# Altium PCB displays.PcbDoc
Units mm, origin at the board's own origin, x right, y up, seen from the top; angles counter-clockwise.
Board outline 140 x 42 mm, 2 copper layers (Top Layer, Bottom Layer); 16 components, 17 nets, 83 pads, 0 vias.
Unrouted connection lines stored in the file: 3.
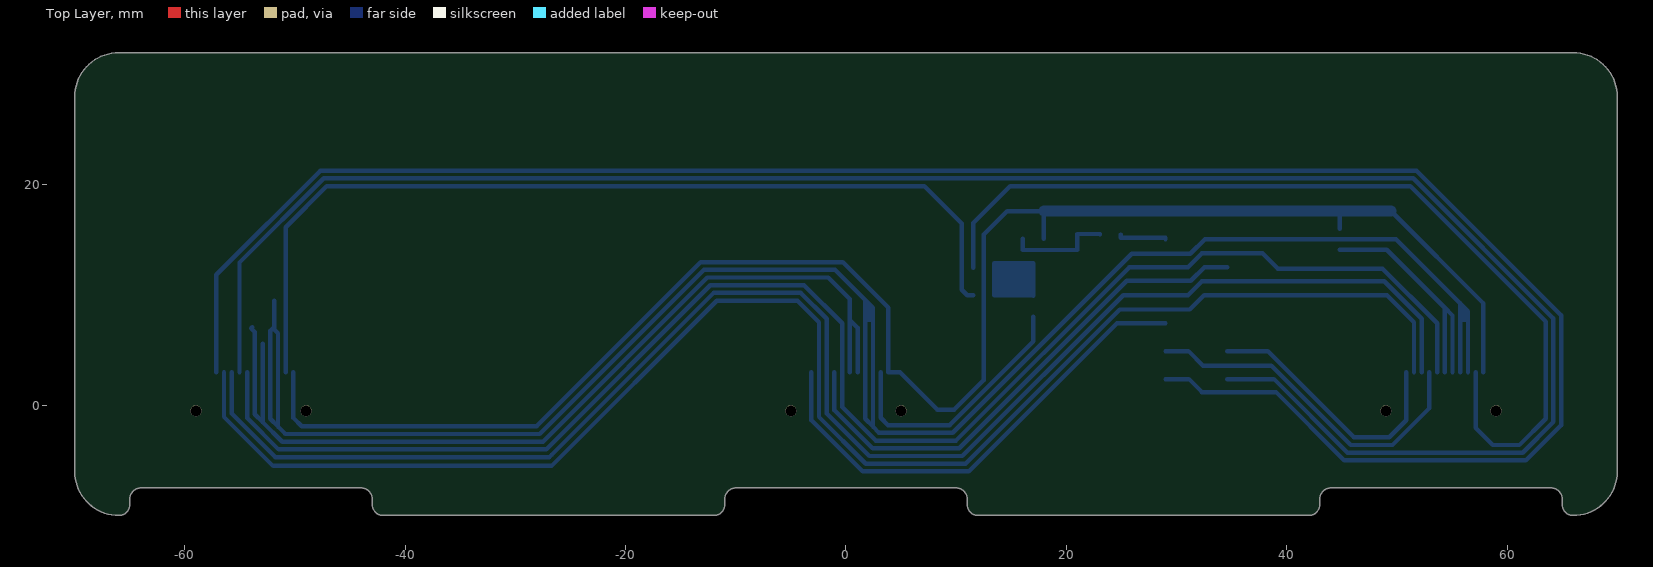
[diagram p0: Top Layer view]
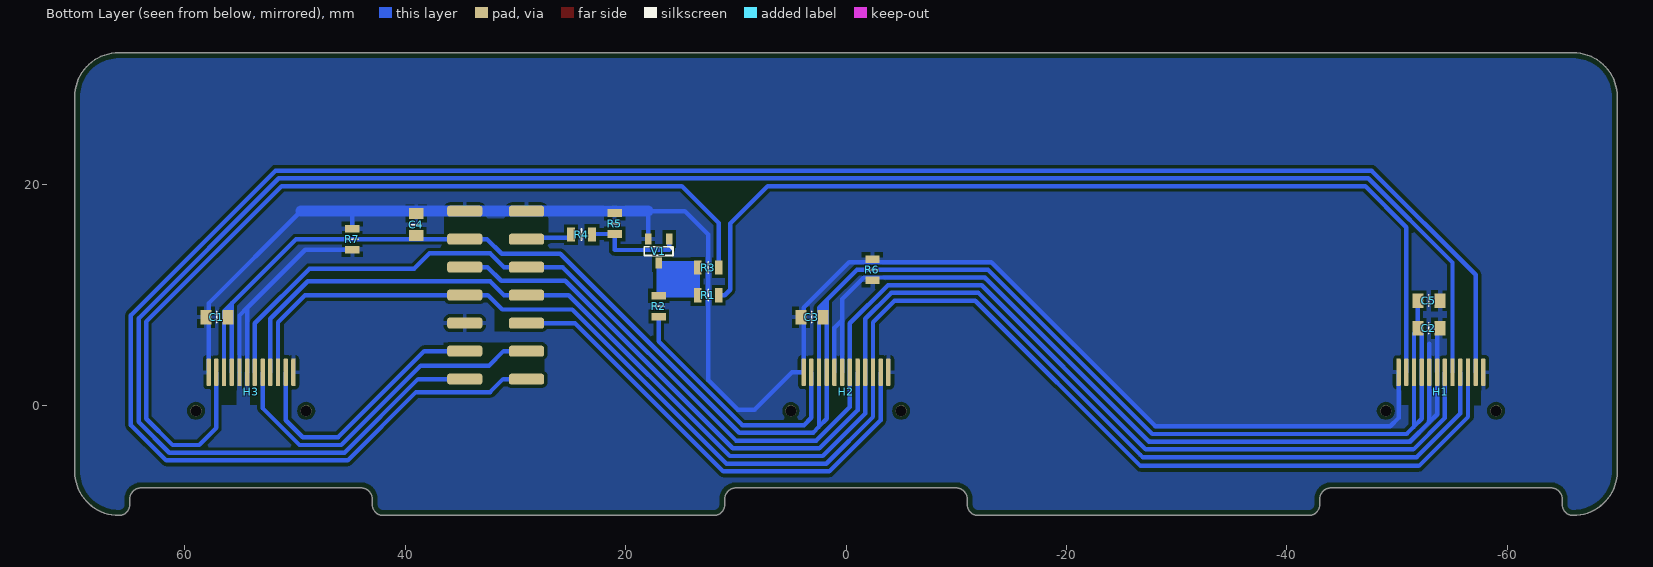
[diagram p1: Bottom Layer view, seen from below]
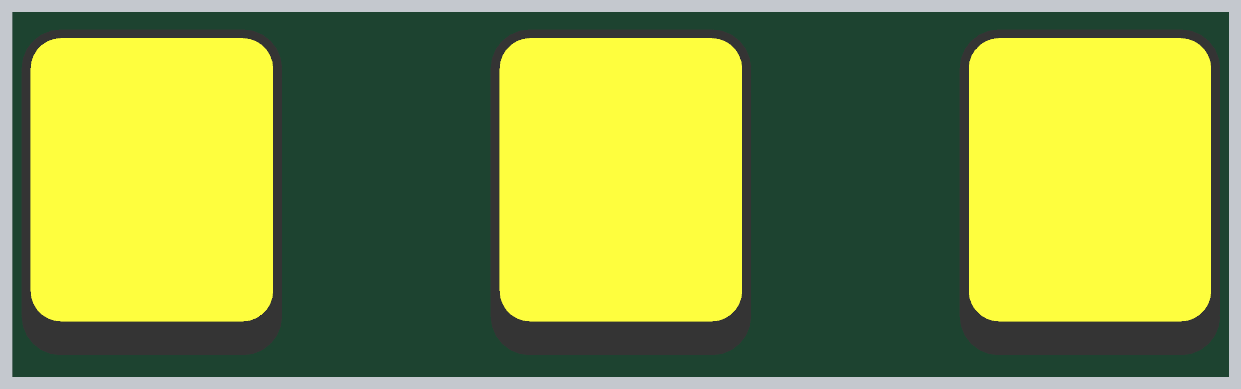
[diagram p2: 3D render of the assembled board from above, using the file's embedded part models]

## Layer stack, top to bottom
Top Solder: solder mask 0.0102, Solder Resist, Dk 3.5
Top Layer: signal copper 0.0356
Dielectric 1: dielectric 0.32, FR-4, Dk 4.8
Bottom Layer: signal copper 0.0356
Bottom Solder: solder mask 0.0102, Solder Resist, Dk 3.5

## Board outline
-66,-10 ccw(c-66,-9) -65,-9 -65,-8.5 cw(c-64,-8.5) -64,-7.5 -44,-7.5 cw(c-44,-8.5) -43,-8.5 -43,-9 ccw(c-42,-9) -42,-10 -12,-10 ccw(c-12,-9) -11,-9 -11,-8.5 cw(c-10,-8.5) -10,-7.5 10,-7.5 cw(c10,-8.5) 11,-8.5 11,-9 ccw(c12,-9) 12,-10 42,-10 ccw(c42,-9) 43,-9 43,-8.5 cw(c44,-8.5) 44,-7.5 64,-7.5 cw(c64,-8.5) 65,-8.5 65,-9 ccw(c66,-9) 66,-10 ccw(c66,-6) 70,-6 70,28 ccw(c66,28) 66,32 -66,32 ccw(c-66,28) -70,28 -70,-6 ccw(c-66,-6)

## Design rules (kind name [scope] priority, off if disabled: settings)
BoardOutlineClearance [All] p1: gap=0.5 ignorepadtopadclearanceinfootprint=FALSE
Clearance [All] p1: gap=0.3 ignorepadtopadclearanceinfootprint=FALSE
MinimumSolderMaskSliver [All] p1: minsoldermaskwidth=0.05
PolygonConnect [All] p1: connectstyle=Relief reliefconductorwidth=0.4 reliefentries=4 polygonreliefangle="90 Angle" airgapwidth=0.3
RoutingVias [All] p1: holewidth=0.711 width=1.27 viastyle="Through Hole" minholewidth=0.711 minwidth=1.27 maxholewidth=0.711 maxwidth=1.27
SilkToSilkClearance [All] p1: silktosilkclearance=0.1
SilkToSolderMaskClearance [IsPad] p1: minsilkscreentomaskgap=0.1 clearancetoexposedcopper=TRUE
SolderMaskExpansion [All] p1: expansion=0.102
Width [All] p1: maxlimit=1 minlimit=0.4 preferedwidth=0.4
27 further rules are at their usual default settings.

## Components (designator, comment, footprint, x,y, rotation, side; value= is the part's Value field where it differs from the comment)
C1 "GRM21BR71H104K" 0805-CAP 57.1,8 r180 bottom value="0.1 мкФ"
C2 "GRM21BR71H104K" 0805-CAP -52.9,7 r0 bottom value="0.1 мкФ"
C3 "GRM21BR71H104K" 0805-CAP 3.1,8 r180 bottom value="0.1 мкФ"
C4 "GRM21BR61C106K" 0805-CAP 39,16.4 r270 bottom value="10 мкФ"
C5 "GRM21BR61C106K" 0805-CAP -52.9,9.5 r0 bottom value="10 мкФ"
H1 "IPS display 240x280 st7789v2 SPI" "(Требует доработки) IPS display 240x280 st7789v2 SPI" -54,0 r0 top
H2 "IPS display 240x280 st7789v2 SPI" "(Требует доработки) IPS display 240x280 st7789v2 SPI" 0,0 r0 top locked
H3 "IPS display 240x280 st7789v2 SPI" "(Требует доработки) IPS display 240x280 st7789v2 SPI" 54,0 r0 top
R1 "RC0805FR-0710KL" 0805-RES 12.5,10 r0 bottom value="10 кОм"
R2 "RC0805FR-0710KL" 0805-RES 17,9 r90 bottom value="10 кОм"
R3 "RC0805FR-0710KL" 0805-RES 12.5,12.5 r0 bottom value="10 кОм"
R4 "RC0805FR-0710KL" 0805-RES 24,15.5 r180 bottom value="10 кОм"
R5 "RC0805FR-0710KL" 0805-RES 21,16.5 r270 bottom value="10 кОм"
R6 "RC0805FR-0710KL" 0805-RES -2.4,12.3 r270 bottom value="10 кОм"
R7 "RC0805FR-0710KL" 0805-RES 44.8,15.08 r270 bottom value="10 кОм"
V1 "IRLML2030TRPBF" SOT-23-3 17,14 r0 bottom

## Footprints (in the part's own frame and the unit in brackets; to place one, negate y for a bottom-side part, rotate by r counter-clockwise, add the part's x,y. Pads: shape width x height; smd on the part's side, far side on the other; paste and mask are expansions set on the pad)
0805-CAP [mm] "Согласно IPC-SM-782"
  rect 1x1.3 smd: 1(-1,0) 2(1,0)
  silkscreen extent 0,-0.51 0,0.51, body extent -1,-0.6 1,0.6, height 1.2
0805-RES [mm] "Standard Thick Film Chip Resistors D/CRCW e3 Vishay"
  rect 0.7x1.3 smd: 1(-0.95,0) 2(0.95,0)
  silkscreen extent 0,-0.51 0,0.51, body extent -1,-0.63 1,0.63, height 0.5
"(Требует доработки) IPS display 240x280 st7789v2 SPI" [mm] "SPI нтерфейс"
  rrect50% 0.4x2.5 smd far side: 1(3.85,3) 2(3.15,3) 3(2.45,3) 4(1.75,3) 5(1.05,3) 6(0.35,3) 7(-0.35,3) 8(-1.05,3) 9(-1.75,3) 10(-2.45,3) 11(-3.15,3) 12(-3.85,3)
  round 1 hole 1: PAD(-5,-0.5) PAD(5,-0.5)
  body extent -15,-7.5 15,30, height 1.5
SOT-23-3 [mm] "SOT-23-3 ??????? n-????????? ??????????. Designators G, D, S"
  rect 0.6x1 smd: D(0,1.1) G(-0.95,-1.1) S(0.95,-1.1)
  silkscreen extent -1.3,-0.4 1.3,0.4, body extent -1.45,-1.19 1.45,1.19, height 1

## Part data
C1 C2 C3: library part CMP-0544-A.1, "Конденсатор керамический, 0.1 мкФ, X7R, 50 В, точность 10%, 0805", Voltage="50 В", Accuracy=10%
C4 C5: library part CMP-0164-A.4, "Конденсатор керамичеcкий, 10 мкФ, X5R, 16 В, точность 10%, 0805", Manufacturer=Murata, Voltage="16 В", Accuracy="10 %"
H1 H2 H3: library part CMP-0733-A.1, "Дисплей цветной, 1.69 дюйма, 240 x 280 точки, IPS, LH169T-IG01", Manufacturer=NA, Temperature=NA
R1 R2 R3 R4 R5 R6 R7: library part CMP-0677-A.2, "Резистор, 10 кОм, 0.125 Вт, точность 1%, 0805", Accuracy=1%
V1: library part CMP-0630-A.1, "N-канальный транзистор, 30 в, 100 мОм(10 в), 2.7 а", Manufacturer="International Rectifier", Temperature="-55 - 150°C"

## Free pads (board coordinates)
  rrect50% 3.2x1 smd far side: 1(34.6,2.38) 2(29,2.38) 3(34.6,4.92) 4(29,4.92) 5(34.6,7.46) 6(29,7.46) 7(34.6,10) 8(29,10) 9(34.6,12.54) 10(29,12.54) 11(34.6,15.08) 12(29,15.08) 13(34.6,17.62) 14(29,17.62)

## Nets (pads, with @x,y where several pads share a name; then routed paths per layer and width w, separated by ;. In a path a pad name is that pad's centre, name@x,y a point inside that pad or via, vN(x,y) a via of type N, cw(c..) or ccw(c..) an arc to the next point about the centre after c; other vN are vias at no path point)
3V3: C1.2 C2.2 C3.2 C4.2 C5.2 H1.3 H1.4 H2.3 H2.4 H3.3 H3.4 pad.11 | length 181.4
  Bottom Layer w0.4: C2.2 C5.2 ; 1.75,9.5 H2.4 1.75,-1.23 2.45,-1.93 ; H3.4 55.75,9.25 ; H3.3 56.45,8.55 55.75,9.25 ; -51.55,-1.93 -50.88,-2.6 -27.79,-2.6 -12.89,12.3 -1,12.3 2.45,8.85 H2.3 2.45,-1.93 ; -51.55,-1.93 -52.25,-1.23 H1.4 -52.25,6.75 -52,7 -51.55,6.55 H1.3 -51.55,-1.93 ; 2.45,-1.93 2.72,-2.2 2.72,-2.23 2.99,-2.5 9.69,-2.5 25.94,13.75 31.25,13.75 32.58,15.08 pad.11 49.92,15.08 55.75,9.25
BLK: pad.12 R4.1 | length 4.5
  Bottom Layer w0.4: R4.1 24.95,15.2 29,15.2 pad.12
CS0: H1.8 pad.1 | length 180.6
  Bottom Layer w0.4: H1.8 -55.05,12.96 -47.41,20.6 51.49,20.6 64.2,7.89 64.2,-1.51 61.41,-4.3 45.52,-4.3 38.84,2.38 pad.1
CS1: H2.8 pad.9 | length 47.3
  Bottom Layer w0.4: H2.8 -1.05,-0.44 2.41,-3.9 10.27,-3.9 25.47,11.3 31.3,11.3 32.54,12.54 pad.9
CS2: H3.8 pad.4 | length 32.1
  Bottom Layer w0.4: pad.4 31.08,4.92 32.4,3.6 38.61,3.6 45.81,-3.6 49.6,-3.6 52.95,-0.25 H3.8
DC: H1.7 H2.7 H3.7 pad.10 | length 143.9
  Bottom Layer w0.4: H1.7 -54.35,-1.15 -51.5,-4 -27.21,-4 -12.31,10.9 -3.81,10.9 -0.35,7.44 H2.7 -0.35,-0.15 2.7,-3.2 9.98,-3.2 25.72,12.54 pad.10 31.04,12.54 32.3,13.8 37.8,13.8 39.2,12.4 48.69,12.4 53.65,7.44 H3.7
GND: C1.1 C2.1 C3.1 C4.1 C5.1 H1.1 H1.5 H1.6 H1.12 H2.1 H2.5 H2.6 H2.12 H3.1 H3.5 H3.6 H3.12 pad.5 pad.13 pad.14 R5.1 R6.1 R6.2 R7.1 R7.2 V1.S | length 269.3
  Bottom Layer w0.4: C2.1@-53.9,7.1 -54,7 -53.65,6.65 H1.6 -53.65,-0.82 -52.95,-1.52 ; -52.95,5.6 H1.5 -52.95,-1.52 ; H1.1 -50.15,-1.15 -49.4,-1.9 -28.08,-1.9 -13.18,13 -0.3,13 3.85,8.85 H2.1 4.9,3 8.3,-0.4 9.81,-0.4 12.5,2.29 12.5,15.5 14.62,17.62 17.95,17.62 ; H2.6 0.35,7.73 ; H2.5 1.05,7.03 0.35,7.73 ; V1.S 17.95,17.62 ; 18,17.62 17.95,17.62 ; R7.2 49.07,14.13 54.35,8.85 ; R7.1 44.8,17.62 ; 49.48,17.62 57.85,9.25 H3.1 ; H3.6 54.35,8.85 ; H3.5 55.05,8.15 54.35,8.85 ; -52.95,-1.52 -51.17,-3.3 -27.5,-3.3 -12.6,11.6 -1.6,11.6 0.35,9.65 0.35,7.73
  Bottom Layer w1: 17.95,17.62 pad.14 pad.13 44.8,17.62 49.48,17.62
LEDK0: H1.2 R1.1 | length 84.7
  Bottom Layer w0.4: H1.2 -50.85,16.17 -47.12,19.9 7.1,19.9 10.5,16.5 10.5,10.5 11,10 R1.1
LEDK1: H2.2 R2.1 | length 23.7
  Bottom Layer w0.4: H2.2 3.15,-1.14 3.81,-1.8 9.4,-1.8 17,5.8 R2.1
LEDK2: H3.2 R3.1 | length 84.3
  Bottom Layer w0.4: R3.1 11.55,16.55 14.9,19.9 51.2,19.9 63.5,7.6 63.5,-1.22 61.12,-3.6 58.7,-3.6 57.15,-2.05 H3.2
NetR1_2: R1.2 R2.2 R3.2 V1.D | length 12.9
  Bottom Layer w0.4: R2.2 R2.2@17,10 ; R2.2@17,10 R1.2 R3.2 13.45,12.9 V1.D R2.2@17,10
NetR4_2: R4.2 R5.2 V1.G | length 9.5
  Bottom Layer w0.4: V1.G 16.05,14.1 21,14.1 R5.2 23.05,15.55 R4.2
RST0: H1.11 pad.2 | length 190.5
  Bottom Layer w0.4: H1.11 -57.15,11.85 -47.7,21.3 51.78,21.3 64.9,8.18 64.9,-1.8 61.7,-5 45.23,-5 39.03,1.2 32.3,1.2 31.12,2.38 pad.2
RST1: H2.11 pad.6 | length 44
  Bottom Layer w0.4: H2.11 -3.15,-1.34 1.51,-6 11.14,-6 24.6,7.46 pad.6
RST2: H3.11 pad.3 | length 24.5
  Bottom Layer w0.4: pad.3 38.28,4.92 46.1,-2.9 49.3,-2.9 50.85,-1.35 H3.11
SCL: H1.9 H2.9 H3.9 pad.8 | length 143.5
  Bottom Layer w0.4: H1.9 -55.75,-0.74 -51.79,-4.7 -26.92,-4.7 -26.72,-4.5 -12.02,10.2 -4.1,10.2 -1.75,7.85 H2.9 -1.75,-0.74 2.11,-4.6 10.56,-4.6 25.16,10 pad.8 31.04,10 32.3,11.26 48.84,11.26 52.25,7.85 H3.9
SDA: H1.10 H2.10 H3.10 pad.7 | length 143.2
  Bottom Layer w0.4: H1.10 -56.45,-1.05 -52,-5.5 -26.73,-5.5 -11.73,9.5 -4.4,9.5 -2.45,7.55 H2.10 -2.45,-1.05 1.8,-5.3 10.85,-5.3 24.85,8.7 31.2,8.7 32.5,10 pad.7 49.1,10 51.55,7.55 H3.10
pads on no net: H1.PAD H2.PAD H3.PAD

## Polygon pours and split planes (outlines as drawn)
GND on Bottom Layer "Bottom-GND" (solid, remove dead copper, pour order 0): 81,-10 81,32 -80,32 -80,-10

## Other copper
Bottom Layer:
  pour cut-out: 56.9,1.9 56.9,0 55.3,0 55.3,1.9
  pour cut-out: 54.1,1.9 54.1,0 53.2,0 53.2,1.9
  pour cut-out: -57.6,1.8 -57.6,0 -56.8,0 -56.8,1.8
  pour cut-out: -50.4,1.8 -50.4,0 -51.1,0 -51.1,1.8
  pour cut-out: 29.7,6.7 31.9,6.7 31.9,8.7 29.7,8.7
  pour cut-out: 27.4,5.7 27.4,2.2 36.5,2.2 36.5,5.7
  pour cut-out: 27,17 36.5,17 36.5,14.6 27,14.6
  region net NetR1_2: 13.45,12.9 13.45,9.95 17,9.95 17,12.9
  region net 3V3: 2.5,7.6 2.5,8.8 1.75,9.55 1.75,7.6
  region net 3V3: 56.5,7.6 56.5,8.5 55.75,9.25 55.75,7.6

## Silkscreen, mask and mechanical layers (free items; w line width, h text height)
Mechanical 1:
  lines w0.1: -66,32 ccw(c-66,28) -70,28 -70,-6 ccw(c-66,-6) -66,-10 ccw(c-66,-9) -65,-9 -65,-8.5 cw(c-64,-8.5) -64,-7.5 -44,-7.5 cw(c-44,-8.5) -43,-8.5 ; -66,32 ccw(c-66,32) -66,32 ; -66,32 66,32 cw(c66,28) 70,28 70,-6 cw(c66,-6) 66,-10 cw(c66,-9) 65,-9 65,-8.5 ; -66,32 -66,32 ; -65,32 ccw(c-65,32) -65,32 ; -65,32 -65,32 ; -43,-8.5 ccw(c-43,-8.5) -43,-8.5 ; -43,-8.5 -43,-9 ccw(c-42,-9) -42,-10 -12,-10 ccw(c-12,-9) -11,-9 -11,-8.5 ; -11,-8.5 ccw(c-11,-8.5) -11,-8.5 ; -11,-8.5 cw(c-10,-8.5) -10,-7.5 10,-7.5 cw(c10,-8.5) 11,-8.5 ; 11,-8.5 ccw(c11,-8.5) 11,-8.5 ; 11,-8.5 11,-9 ccw(c12,-9) 12,-10 42,-10 ccw(c42,-9) 43,-9 43,-8.5 ; 43,-8.5 cw(c44,-8.5) 44,-7.5 64,-7.5 cw(c64,-8.5) 65,-8.5 ; 43,-8.5 ccw(c43,-8.5) 43,-8.5 ; 65,-8.5 ccw(c65,-8.5) 65,-8.5

## Text inside footprints (layer, text, board x,y; h text height)
H1: Mechanical 15 "SPACE FOR WIRE" at -58.25,-9.25 h1.5; Mechanical 15 "BOARD EDGE" at -57,-6.75 h1.5
H2: Mechanical 15 "SPACE FOR WIRE" at -4.25,-9.25 h1.5; Mechanical 15 "BOARD EDGE" at -3,-6.75 h1.5
H3: Mechanical 15 "SPACE FOR WIRE" at 49.75,-9.25 h1.5; Mechanical 15 "BOARD EDGE" at 51,-6.75 h1.5